# Altium PCB LM317.PcbDoc
Units mil, origin at the board's own origin, x right, y up, seen from the top; angles counter-clockwise.
Board outline 1968.5 x 1574.8 mil, 2 copper layers (Top Layer, Bottom Layer); 12 components, 7 nets, 27 pads, 0 vias.
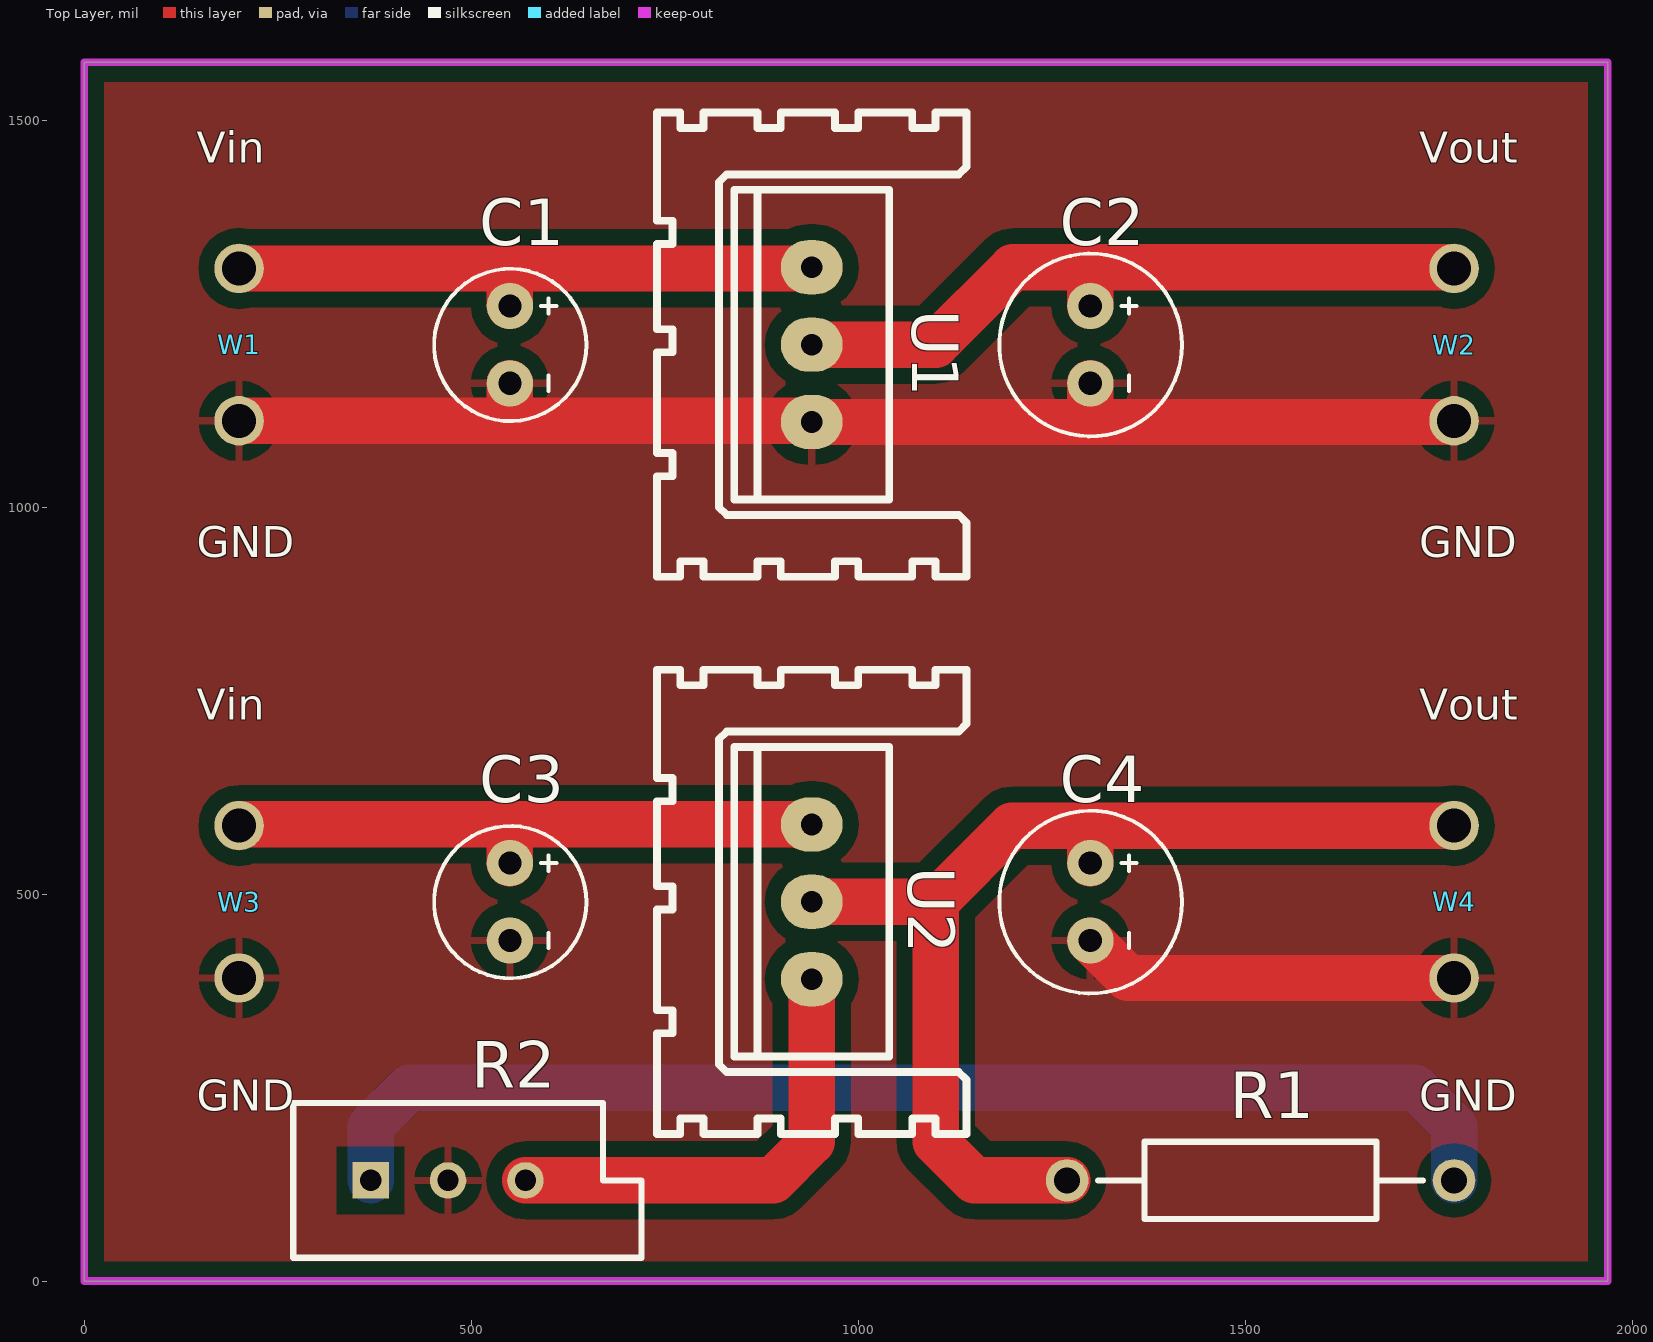
[diagram p0: Top Layer view]
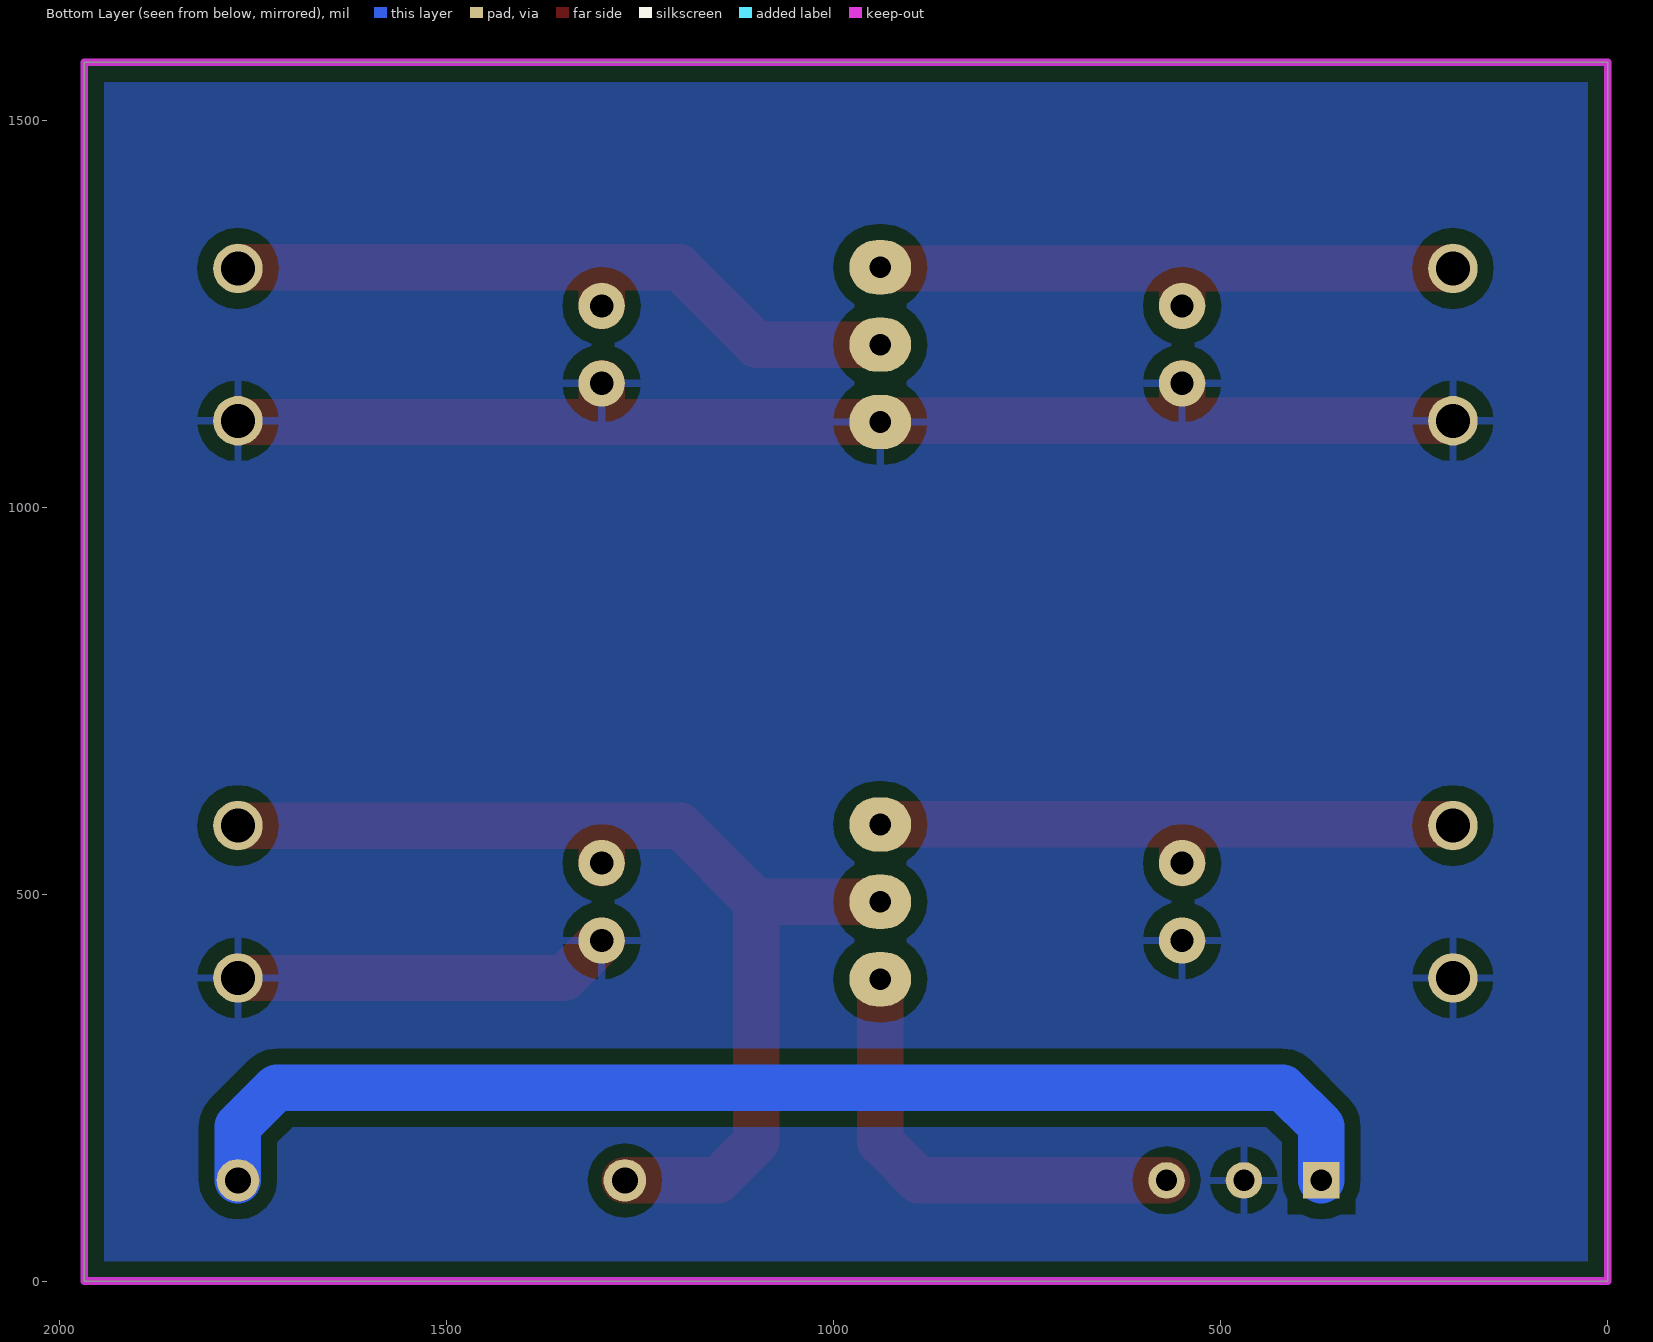
[diagram p1: Bottom Layer view, seen from below]

## Layer stack, top to bottom
Top Layer: signal copper 1.4
Dielectric: dielectric 12.6, FR-4, Dk 4.8
Bottom Layer: signal copper 1.4

## Board outline
0,0 1968.5,0 1968.5,1574.8 0,1574.8

## Design rules (kind name [scope] priority, off if disabled: settings)
Clearance [All] p1: gap=20
PolygonConnect [All] p1: connectstyle=Relief reliefconductorwidth=10 reliefentries=4 polygonreliefangle="90 Angle"
RoutingVias [All] p1: holewidth=28 width=50 viastyle="Through Hole" minholewidth=28 minwidth=50 maxholewidth=28 maxwidth=50
SilkscreenOverComponentPads [All] p1: minsilkscreentomaskgap=10
SolderMaskExpansion [All] p1: expansion=4
Width [All] p1: maxlimit=60 minlimit=10 preferedwidth=10 minimp=50.000000 maximp=50.000000 favimp=50.000000
27 further rules are at their usual default settings.

## Classes and differential pairs
component class LM317: C1 C2 C3 C4 LM317 W1 W2 W3 W4

## Components (designator, comment, footprint, x,y, rotation, side; value= is the part's Value field where it differs from the comment)
C1 "CAPACITOR POL" Cap_Pol_F5 550,1260 r270 top
C2 "CAPACITOR POL" Cap_Pol_F6 1300,1260 r270 top
C3 "CAPACITOR POL" Cap_Pol_F5 550,540 r270 top
C4 "CAPACITOR POL" Cap_Pol_F6 1300,540 r270 top
R1 "Res Semi" AXIAL-0.5 1520,130 r0 top
R2 "RPot" VR5 470,130 r0 top
U1 "LM317" 78XX 730,900 r90 top
U2 "LM317" 78XX 730,180 r90 top
W1 "2Way_5" 2Way_5 200,1210 r270 top
W2 "2Way_5" 2Way_5 1770,1210 r90 top
W3 "2Way_5" 2Way_5 200,490 r270 top
W4 "2Way_5" 2Way_5 1770,490 r90 top

## Footprints (in the part's own frame and the unit in brackets; to place one, negate y for a bottom-side part, rotate by r counter-clockwise, add the part's x,y. Pads: shape width x height; smd on the part's side, far side on the other; paste and mask are expansions set on the pad)
2Way_5 [mil]
  round 64 hole 44: 1(-98.43,0) 2(98.43,0)
  body extent -225,-185 198,189, height 591
78XX [mil] "78"
  oval 70x80 hole 28: 1(210,-210) 2(310,-210) 3(410,-210)
  silkscreen extent 10,-410 610,-10
AXIAL-0.5 [mm] "Axial Device, Thru-Hole; 2 Leads; 0.5 in Pin Spacing"
  round 1.4 hole 0.85: 1(-6.35,0) 2(6.35,0)
  silkscreen extent -5.33,-1.27 5.33,1.27
Cap_Pol_F5 [mil] "Cap F5"
  round 60 hole 30: 1(0,0) 2(100,0)
  silkscreen extent -48,-98 149,99
Cap_Pol_F6 [mil] "Cap F5"
  round 60 hole 30: 1(0,0) 2(100,0)
  silkscreen extent -68,-118 168,119
VR5 [mm] "Thru-Hole; 3 Leads"
  rect 1.2x1.2 hole 0.7: 1(-2.54,0)
  round 1.2 hole 0.7: 2(0,0) 3(2.54,0)
  silkscreen extent -5.08,-2.54 6.35,2.54

## Part data
C1 C2 C4: "Capacitor"
C3: "10uF"
R1: "Semiconductor Resistor"
R2: "Potentiometer"
U1 U2: "LM317 电源芯片"
W1 W2 W3 W4: "DB"

## Nets (pads, with @x,y where several pads share a name; then routed paths per layer and width w, separated by ;. In a path a pad name is that pad's centre, name@x,y a point inside that pad or via, vN(x,y) a via of type N, cw(c..) or ccw(c..) an arc to the next point about the centre after c; other vN are vias at no path point)
GND: C1.2 C2.2 C3.2 C4.2 R2.2 U1.1 W1.2 W2.1 W3.2 W4.1 | length 2159.8
  Top Layer w60: W1.2 550,1111.57 ; C1.2 550,1111.57 ; C4.2 1348.43,391.57 W4.1 ; C2.2 1300,1110 ; W2.1 1768.43,1110 1300,1110 ; 550,1111.57 938.43,1111.57 U1.1 1300,1110
NetC1_1: C1.1 U1.3 W1.1 | length 802.6
  Top Layer w60: W1.1 560,1308.43 ; C1.1 550,1298.43 560,1308.43 ; U1.3@950,1308.43 560,1308.43
NetC2_1: C2.1 U1.2 W2.2 | length 922.1
  Top Layer w60: U1.2 1100,1210 1200,1310 1300,1310 ; C2.1 1300,1310 ; W2.2 1768.43,1310 1300,1310
NetC3_1: C3.1 U2.3 W3.1 | length 792.7
  Top Layer w60: W3.1 201.57,590 545,590 ; C3.1 550,585 545,590 ; U2.3 545,590
NetC4_1: C4.1 R1.1 U2.2 W4.2 | length 1419.9
  Top Layer w60: U2.2 1100,490 ; R1.1 1150,130 1100,180 1100,490 ; C4.1 1300,588.43 ; W4.2 1300,588.43 ; 1100,490 1198.43,588.43 1300,588.43
NetR1_2: R1.2 R2.1 | length 1581.4
  Bottom Layer w60: R2.1 370,200 420,250 1720,250 1770,200 R1.2
NetR2_3: R2.3 U2.1 | length 600.7
  Top Layer w60: R2.3 890,130 940,180 U2.1

## Polygon pours and split planes (outlines as drawn)
GND on Top Layer "Keep-Out Layer-No Net" (solid, pour order 6): 0,1574.8 1968.5,1574.8 1968.5,0 0,0
GND on Bottom Layer "Keep-Out Layer-No Net" (solid, pour order 3): 0,1574.8 1968.5,1574.8 1968.5,0 0,0

## Keep-outs
Keep-Out Layer:
  the board outline again, w10

## Silkscreen, mask and mechanical layers (free items; w line width, h text height)
Top Overlay:
  text "Vin" at 145,1445 h40
  text "Vout" at 1725,1445 h40
  text "GND" at 145,935 h40
  text "GND" at 1725,935 h40
  text "Vin" at 145,725 h40
  text "Vout" at 1725,725 h40
  text "GND" at 145,220 h40
  text "GND" at 1725,220 h40